# Altium PCB loxonext.PcbDoc
Units mm, origin at the board's own origin, x right, y up, seen from the top; angles counter-clockwise.
Board outline 86.5 x 30.5 mm, 2 copper layers (Sig/Pwr-1, Sig/Gnd-2); 41 components, 28 nets, 168 pads, 37 vias.
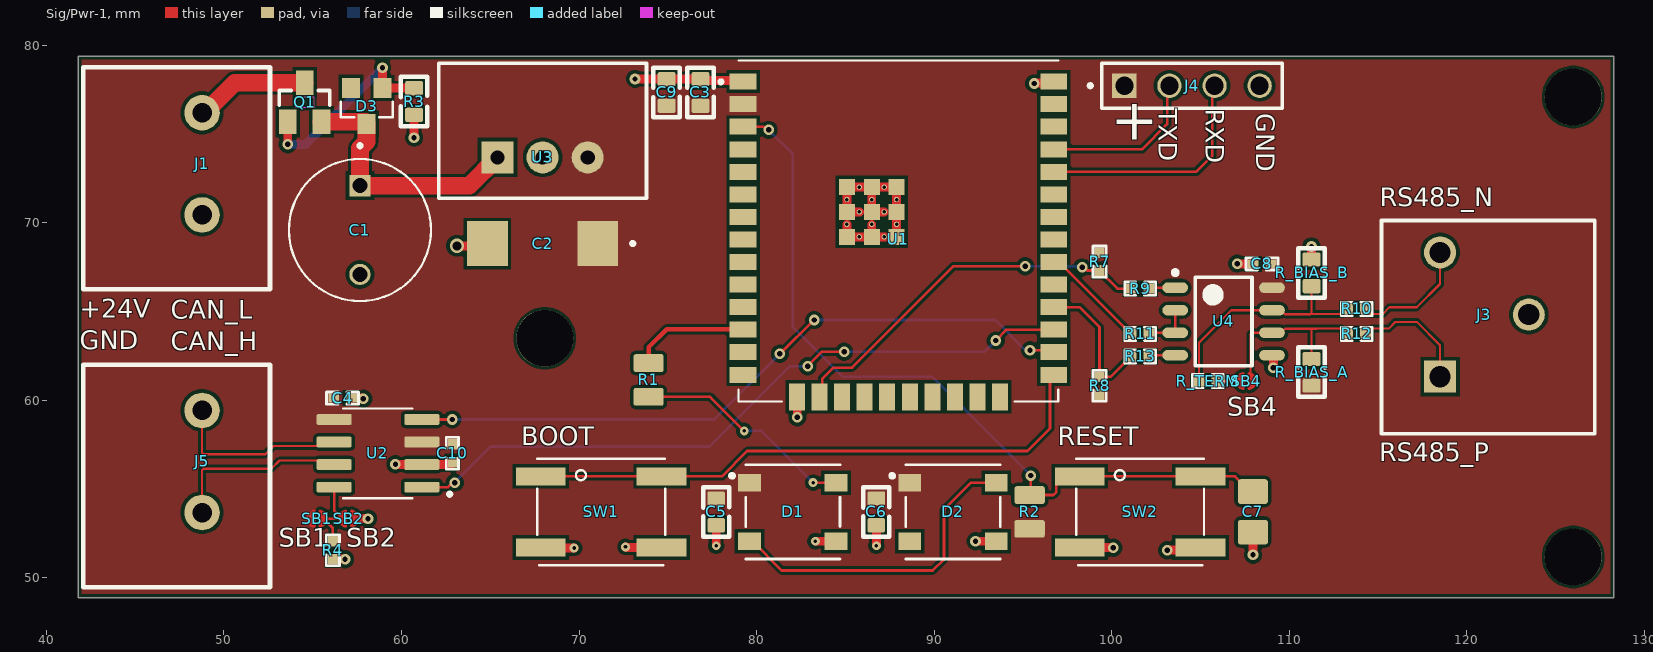
[diagram p0: Sig/Pwr-1 view]
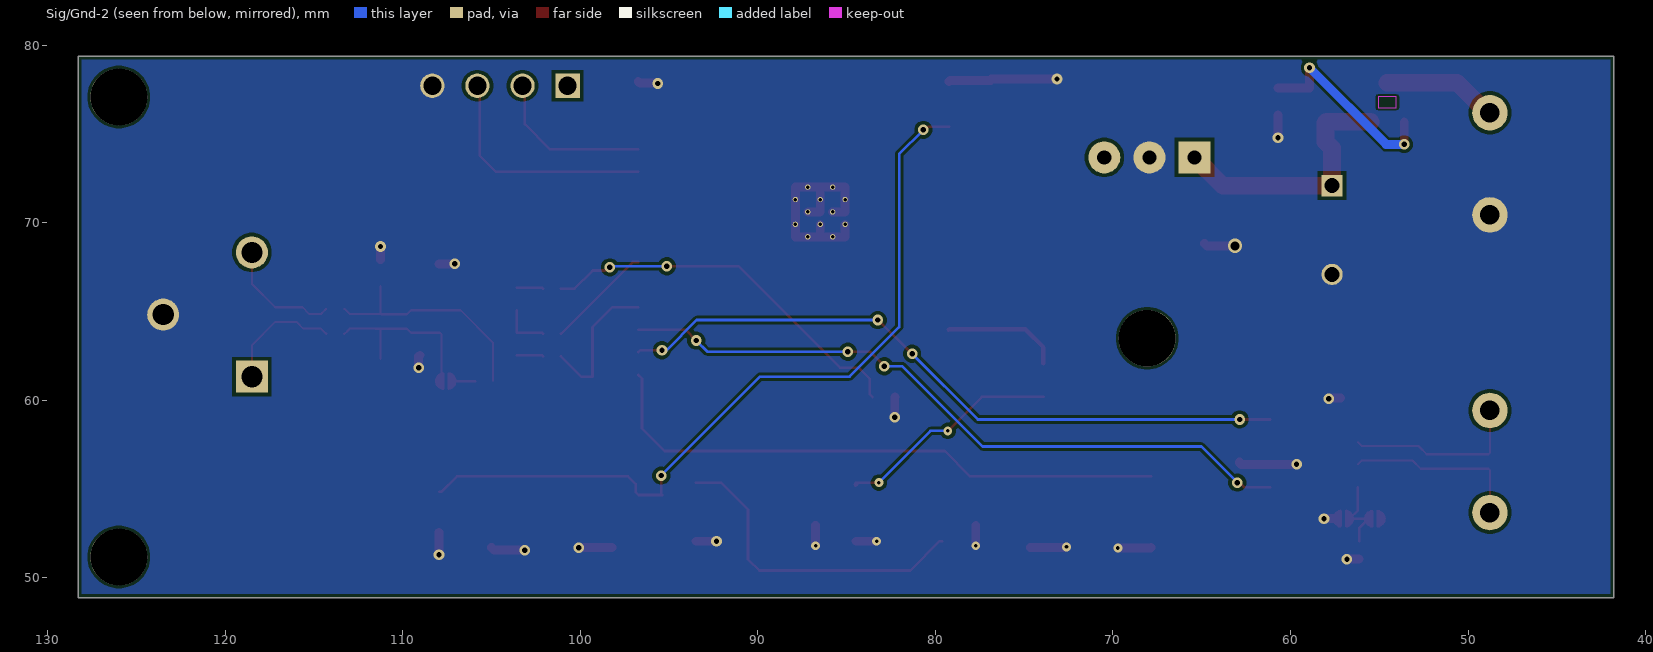
[diagram p1: Sig/Gnd-2 view, seen from below]

## Layer stack, top to bottom
Top Solder: solder mask 0.0102, Solder Resist, Dk 3.5
Sig/Pwr-1: signal copper 0.0356
Dielectric 1: dielectric 0.32, FR-4, Dk 4.8
Sig/Gnd-2: signal copper 0.0356
Bottom Solder: solder mask 0.0102, Solder Resist, Dk 3.5

## Board outline
41.783,48.895 41.783,79.395 128.283,79.395 128.283,48.895

## Design rules (kind name [scope] priority, off if disabled: settings)
BoardOutlineClearance [All] p1: gap=0.254 ignorepadtopadclearanceinfootprint=FALSE except(0: Arc-SplitContinuation Track-SplitContinuation SMDPad-SplitContinuation THPad-SplitContinuation Via-SplitContinuation Fill-SplitContinuation Poly-SplitContinuation Region-SplitContinuation Text-SplitContinuation; 0.2: Arc-OutlineEdge Track-OutlineEdge SMDPad-OutlineEdge THPad-OutlineEdge Via-OutlineEdge Fill-OutlineEdge Poly-OutlineEdge Region-OutlineEdge Text-OutlineEdge)
Clearance [All] p1: gap=0.15 ignorepadtopadclearanceinfootprint=TRUE except(0.18: SMDPad-THPad SMDPad-Via SMDPad-Fill SMDPad-Poly SMDPad-Region SMDPad-Text; 0.2: Arc-THPad Track-THPad THPad-THPad THPad-Via THPad-Fill THPad-Poly THPad-Region THPad-Text Via-Fill Via-Poly Via-Region Text-Text)
DiffPairsRouting [All] p1: maxlimit=0.7 minlimit=0.7 mostfreqgap=0.7 toplayer_minwidth=0.12 toplayer_maxwidth=0.12 toplayer_prefwidth=0.12 bottomlayer_minwidth=0.12 bottomlayer_maxwidth=0.12 bottomlayer_prefwidth=0.12 impedanceprofiledriven=TRUE impedanceprofileid={38C9F42A-9F48-491C-A51E-86A988703F38} impedanceprofilevalue=120.000000 maxuncoupledlength=12.7
PlaneConnect [All] p1: planeconnectstyle=Direct reliefexpansion=0.508 reliefentries=4 reliefconductorwidth=0.254 reliefairgap=0.254
PolygonConnect [All] p1: connectstyle=Direct reliefconductorwidth=0.254 reliefentries=4 polygonreliefangle="90 Angle" airgapwidth=0.254
RoutingVias [All] p1: holewidth=0.2 width=0.5 viastyle="Through Hole" minholewidth=0.2 minwidth=0.5 maxholewidth=0.5 maxwidth=0.8
SolderMaskExpansion [All] p1: expansion=0.102 istentingtop=FALSE
SupplyNets "Schematic Supply Nets_3" [InNet('GND')] p1: voltage=0.000
SupplyNets "Schematic Supply Nets_2" [InNet('+24V_IN')] p2: voltage=0.000
SupplyNets "Schematic Supply Nets_1" [InNet('+3V3')] p3: voltage=0.000
SupplyNets "Schematic Supply Nets" [InNet('+24V_OUT')] p4: voltage=0.000
Width [All] p1: maxlimit=1 minlimit=0.15 preferedwidth=0.25 minimp=50.000000 maximp=50.000000 favimp=50.000000
28 further rules are at their usual default settings.

## Classes and differential pairs
net class CANBUS: CAN_N CAN_P
net class CAN_UART: CAN_RXD CAN_TXD
component class rs485: C8 J3 R7 R8 R9 R10 R11 R12 R13 R_BIAS_A R_BIAS_B R_TERM SB4 U4
component class esp32-wroom-32: C3 C5 C6 C7 C9 D1 D2 J4 R1 R2 SW1 SW2 U1
component class canbus: C1 C2 C4 C10 D3 J1 J5 Q1 R3 R4 SB1 SB2 U2 U3
differential pair RS485: +RS485_P -RS485_N
differential pair CAN: +CAN_P -CAN_N
differential pair _RS485: +_RS485_P -_RS485_N

## Components (designator, comment, footprint, x,y, rotation, side; value= is the part's Value field where it differs from the comment)
C1 "100u 50V" CAPPRD500W60D800H1150 57.658,69.596 r270 top
C2 "220u 10V" CAPPM7343X310N 67.945,68.834 r180 top
C3 "100n 50V" CAP_0603 76.835,77.343 r270 top
C4 "100n 50V" CAPC1005X04L 56.68,60.13 r180 top value=4.7µF
C5 "100n 50V" CAP_0603 77.724,53.721 r90 top
C6 "100n 50V" CAP_0603 86.741,53.721 r90 top
C7 "100n 50V" CAP_0805 107.95,53.721 r90 top
C8 "100n 50V" CAPC1005X04L 108.458,67.691 r0 top value=4.7µF
C9 "10u 50V" CAP_0603 74.93,77.343 r270 top
C10 "100n 50V" CAPC1005X04L 62.865,57.023 r270 top value=4.7µF
D1 "WS2812B" WS2812B_WDS 82.042,53.721 r0 top
D2 "WS2812B" WS2812B_WDS 91.059,53.721 r0 top
D3 "BZX84C10" SOT-23 58.039,76.581 r180 top
J1 "WAGO 243-721" 243-721 48.668,70.5 r180 top
J3 "DG250-3.5-03P-11-00A(H)" DG250-3.5-03P-11-00AH 118.491,61.335 r90 top
J4 "HX PH254-01-04-Z-L11.5" SAMTEC_TSW-104-08-T-S-LL 100.711,77.724 r0 top
J5 "WAGO 243-721" 243-721 48.668,53.736 r180 top
Q1 "AO3401A" SOT23 54.544,76.792 r0 top
R1 "330R" RES_0805 73.914,61.153 r270 top
R2 "10k" RES_0805 95.377,53.721 r90 top
R3 "100k" RES_0603 60.706,76.835 r90 top
R4 "20k" RESC1005X04L 56.134,51.562 r270 top value=0R
R7 "1k5" RESC1005X04L 99.314,67.818 r270 top value=0R
R8 "1k5" RESC1005X04L 99.314,60.833 r90 top value=0R
R9 "220R" RESC1005X04L 101.6,66.294 r180 top value=0R
R10 "33R" RESC1005X04L 113.792,65.151 r180 top value=0R
R11 "220R" RESC1005X04L 101.6,63.754 r180 top value=0R
R12 "33R" RESC1005X04L 113.792,63.754 r180 top value=0R
R13 "220R" RESC1005X04L 101.6,62.484 r180 top value=0R
R_BIAS_A "10k" RES_0603 111.252,61.583 r270 top
R_BIAS_B "10k" RES_0603 111.252,67.183 r270 top
R_TERM "120R" RESC1005X04L 105.41,61.087 r180 top value=0R
SB1 "Solderbridge" Solderbridge 55.245,53.34 r0 top
SB2 "Solderbridge" Solderbridge 57.023,53.34 r0 top
SB4 "Solderbridge" Solderbridge 107.569,61.087 r0 top
SW1 "EVQQ2W03W" EVQQ2W03W 71.247,53.721 r270 top
SW2 "EVQQ2W03W" EVQQ2W03W 101.6,53.721 r270 top
U1 "ESP32-WROOM-32UE" MODULE_ESP32-WROOM-32UE(M113EH6400UH3Q0) 87.984,69.545 r0 top
U2 "SN65HVD230DG4" SOIC127P599X175-8N 58.674,57.023 r180 top
U3 "TSR_1-2433" TSR-1 67.945,75.184 r0 top
U4 "MAX3485EESA+T" SOIC127P600X175-8N 106.299,64.446 r0 top

## Footprints (in the part's own frame and the unit in brackets; to place one, negate y for a bottom-side part, rotate by r counter-clockwise, add the part's x,y. Pads: shape width x height; smd on the part's side, far side on the other; paste and mask are expansions set on the pad)
243-721 [mm] "Connection terminal, 4 pole, 0.5-1.0 mm², clamping points: 4, gray"
  round 2 hole 1.1: 1(-0.1,0.05) 2(-0.1,-5.7)
  silkscreen extent -3.93,-8.27 6.6,4.25, body extent -3.92,-8.23 6.63,4.28, height 10.1
CAP_0603 [mm]
  rrect25% 0.8x1 smd: 1(-0.75,0) 2(0.75,0)
  silkscreen extent -1.4,-0.74 1.39,0.74, body extent -0.8,-0.4 0.8,0.4, height 0.51
CAP_0805 [mm]
  rrect25% 1.4x1.7 smd: 1(-1.143,0) 2(1.143,0)
  body extent -1.15,-0.76 1.15,0.79, height 1.01
CAPC1005X04L [mm]
  rect 0.6x0.5 smd: 1(-0.5,0) 2(0.5,0)
  silkscreen extent -0.9,-0.35 0.9,0.35, body extent -0.51,-0.25 0.51,0.25, height 0.5
CAPPM7343X310N [mm]
  rect 2.3x2.52 smd paste+0 mask+0.102: 1(-3.11,0) 2(3.11,0)
  silkscreen extent -5.18,-0.1 -4.98,0.1, body extent -3.65,-2.15 3.65,2.15, height 3.1
CAPPRD500W60D800H1150 [mm]
  round 1.2 hole 0.85: N(2.5,0)
  rect 1.2x1.2 hole 0.85: P(-2.5,0)
  silkscreen extent -4.85,-4 4,4, body extent -4,-4 4,4, height 11.5
DG250-3.5-03P-11-00AH [mm]
  rect 1.8x1.8 / inner round 1.8 / far side rect 1.8x1.8 hole 1.2: 1(0,0)
  round 1.8 hole 1.2: 2(3.5,-5) 3(7,0)
  silkscreen extent -3.2,-8.7 8.8,3.3, body extent -3.27,-9.62 8.73,2.38, height 13.46
EVQQ2W03W [mm]
  rect 1x2.8 smd: 1(-2,-3.4) 2(-2,3.4) 3(2,-3.4) 4(2,3.4)
  silkscreen extent -3,-3.62 3,3.6, body extent -2.97,-3.35 3.03,3.25, height 3.1
MODULE_ESP32-WROOM-32UE(M113EH6400UH3Q0) [mm]
  rect 1.5x0.9 smd: 1(-8.75,8.41) 2(-8.75,7.14) 3(-8.75,5.87) 4(-8.75,4.6) 5(-8.75,3.33) 6(-8.75,2.06) 7(-8.75,0.79) 8(-8.75,-0.48) 9(-8.75,-1.75) 10(-8.75,-3.02) 11(-8.75,-4.29) 12(-8.75,-5.56) 13(-8.75,-6.83) 14(-8.75,-8.1) 25(8.75,-8.1) 26(8.75,-6.83) 27(8.75,-5.56) 28(8.75,-4.29) 29(8.75,-3.02) 30(8.75,-1.75) 31(8.75,-0.48) 32(8.75,0.79) 33(8.75,2.06) 34(8.75,3.33) 35(8.75,4.6) 36(8.75,5.87) 37(8.75,7.14) 38(8.75,8.41)
  rect 0.9x1.5 smd: 15(-5.71,-9.35) 16(-4.44,-9.35) 17(-3.17,-9.35) 18(-1.9,-9.35) 19(-0.63,-9.35) 20(0.64,-9.35) 21(1.91,-9.35) 22(3.18,-9.35) 23(4.45,-9.35) 24(5.72,-9.35)
  rect 0.9x0.9 smd: 39_1(-2.9,2.47) 39_2(-1.5,2.47) 39_3(-0.1,2.47) 39_4(-2.9,1.07) 39_5(-1.5,1.07) 39_6(-0.1,1.07) 39_7(-2.9,-0.33) 39_8(-1.5,-0.33) 39_9(-0.1,-0.33)
  round 0.3 hole 0.2: 39_10(-2.2,2.47) 39_11(-0.8,2.47) 39_12(-2.9,1.77) 39_13(-1.5,1.77) 39_14(-0.1,1.77) 39_15(-2.2,1.07) 39_16(-0.8,1.07) 39_17(-2.9,0.37) 39_18(-1.5,0.37) 39_19(-0.1,0.37) 39_20(-2.2,-0.33) 39_21(-0.8,-0.33)
  silkscreen extent -10.1,-9.6 9,9.6, body extent -9,-9.6 9,9.6, height 3.35
RES_0603 [mm]
  rrect25% 0.8x1 smd: 1(-0.75,0) 2(0.75,0)
  silkscreen extent -1.4,-0.75 1.39,0.74, body extent -0.8,-0.43 0.8,0.43, height 0.52
RES_0805 [mm]
  rrect25% 1x1.7 smd: 1(-0.95,0) 2(0.95,0)
  body extent -1,-0.63 1,0.63, height 0.47
RESC1005X04L [mm]
  rect 0.6x0.55 smd mask+0.05: 1(-0.5,0) 2(0.5,0)
  silkscreen extent -0.87,-0.38 0.88,0.38, body extent -0.5,-0.25 0.5,0.25, height 0.3
SAMTEC_TSW-104-08-T-S-LL [mm]
  rect 1.37x1.37 hole 1.02: 01(0,0)
  round 1.37 hole 1.02: 02(2.54,0) 03(5.08,0) 04(7.62,0)
  silkscreen extent -2.02,-1.27 8.89,1.27
SOIC127P599X175-8N [mm]
  rrect25% 1.97x0.6 smd: 1(-2.47,1.905) 2(-2.47,0.635) 3(-2.47,-0.635) 4(-2.47,-1.905) 5(2.47,-1.905) 6(2.47,-0.635) 7(2.47,0.635) 8(2.47,1.905)
  silkscreen extent -4.14,-2.52 1.95,2.52, body extent -3,-2.45 3,2.45, height 1.75
SOIC127P600X175-8N [mm] "SOIC, 8-Leads, Body 4.91x3.90mm, Pitch 1.27mm, IPC Medium Density"
  oval 1.45x0.6 smd: 1(-2.725,1.905) 2(-2.725,0.635) 3(-2.725,-0.635) 4(-2.725,-1.905) 5(2.725,-1.905) 6(2.725,-0.635) 7(2.725,0.635) 8(2.725,1.905)
  silkscreen extent -2.85,-2.5 1.6,2.88, body extent -3,-2.5 3,2.5, height 1.75
Solderbridge [mil]
  round 1 smd paste+0: 1(-13.78,0) 2(13.78,0)
  Sig/Pwr-1 region: -7.49,19.36 -15.76,15.74 -21.55,8.8 -23.62,0 -23.62,0 -21.55,-8.79 -15.76,-15.74 -7.49,-19.36 -7.49,-19.36 -6.18,-19.31 -5.02,-18.71 -4.22,-17.68 -3.94,-16.4 -3.94,-16.4 -3.94,16.4 -4.22,17.68 -5.02,18.71 -6.18,19.31 -7.49,19.36
  Sig/Pwr-1 region: 7.49,-19.36 15.76,-15.74 21.55,-8.8 23.62,0 23.62,0 21.55,8.79 15.76,15.74 7.49,19.36 7.49,19.36 6.18,19.31 5.02,18.71 4.22,17.68 3.94,16.4 3.94,16.4 3.94,-16.4 4.22,-17.68 5.02,-18.71 6.18,-19.31 7.49,-19.36
SOT23 [mm]
  rect 1x1.4 smd: 1(-0.95,-1.1) 2(0.95,-1.1) 3(0,1.1)
  Keep-Out Layer region: 0.5,-0.3 -0.5,-0.3 -0.5,0.3 0.5,0.3
  silkscreen extent -1.42,-0.15 1.42,0.66, body extent -1.45,-1.7 1.45,1.1, height 1.25
SOT-23 [mil]
  rect 40x45 smd: 1(-35,-40) 2(35,-40) 3(0,40)
  silkscreen extent -58,-10 58,25, body extent -57,-51 57,51, height 55
TSR-1 [mm]
  rect 1.8x1.8 hole 0.8: 1(-2.54,-1.5)
  round 1.8 hole 0.8: 2(0,-1.5) 3(2.54,-1.5)
  silkscreen extent -5.85,-3.8 5.85,3.8, body extent -5.8,-3.78 5.9,3.72, height 10.2
WS2812B_WDS [mm]
  rect 1.29x0.99 smd paste+0 mask+0: 1(-2.436,1.65) 2(-2.436,-1.65) 3(2.436,-1.65) 4(2.436,1.65)
  silkscreen extent -3.52,-2.65 2.65,2.65, body extent -2.73,-2.53 2.73,2.53, height 1.63

## Part data
C1: library part ECA1HHG101B, "100F 50V Aluminum Electrolytic Capacitors Radial, Can 1000 Hrs @ 105C", Package="RADIAL-2 Panasonic", Availability="In Stock", Check_prices=https://www.snapeda.com/parts/ECA-1HHG101B/Panasonic%20Electronic%20Components/view-part/800817/?ref=eda, MF="Panasonic Electronic", MP=ECA-1HHG101B, Price=None, SnapEDA_Link=https://www.snapeda.com/parts/ECA-1HHG101B/Panasonic%20Electronic%20Components/view-part/800817/?ref=snap
C2: library part TPSD227M010R0050, "220 ÂµF Molded Tantalum Capacitors 10 V 2917 (7343 Metric) 50mOhm", Package="2917 AVX", Check_prices=https://www.snapeda.com/parts/TPSD227M010R0050/AVX/view-part/?ref=eda, MF=AVX, MP=TPSD227M010R0050, SnapEDA_Link=https://www.snapeda.com/parts/TPSD227M010R0050/AVX/view-part/?ref=snap
C3 C5 C6 C9: library part CAP_0603, "Capacitor SMD 0603"
C4 C8 C10: library part C0402-4µ7, "Capacitor, X5R, ±20%", Manufacturer=N.A., Part number IPS="00000001251, 00000007165", Part number NEMS=100200193, Supplier Part Number 1=490-13252-1-ND, Artikkelnr Noca=20039482, Author=rsk, Component Class=Capacitors, Component Status=Active, ComponentLink1Description=Datasheet, ComponentLink1URL=N.A., ComponentLink2Description="Supplier link", ComponentLink2URL=N.A., Footprint Doc=0402, HelpURL=N.A., LatestRevisionDate=2017-11-09, Manufacturer Part Number=N.A., Note=10V, Pad Count=2, Part Number=C0402-4µ7, Part number Norautron=N.A., PartId=100200193, Published=2009-05-08, Supplier 1=Digi-Key, Supplier 2=N.A., Supplier Part Number 2=N.A.
C7: library part CAP_0805, "Capacitor SMD 0805"
D1 D2: "Description", Manufacturer_Name=Worldsemi, Copyright="Copyright (C) 2026 Ultra Librarian. All rights reserved.", Manufacturer_Part_Number=WS2812B, RefDes=RefDes, Type=Type
J1 J5: library part 243-721, "TERM BLOCK PLUG 1POS 5.75MM"
J3: "Terminal block; 3.5mm; with push button; angled 45Â°; ways: 3; 5A", Package=None, Check_prices=https://www.snapeda.com/parts/DG250-3.5-03P-11-00A(H)/Degson/view-part/?ref=eda, MF=Degson, MP=DG250-3.5-03P-11-00A(H), SnapEDA_Link=https://www.snapeda.com/parts/DG250-3.5-03P-11-00A(H)/Degson/view-part/?ref=snap
J4: library part 4PIN_TSW-104-08-T-S-LL, Package=None, Availability=Unavailable, MF=Samtec, MP=TSW-104-08-T-S-LL, Price=None
Q1: "P-Channel 30 V 4A (Ta) 1.4W (Ta) Surface Mount SOT-23-3", Package="SOT-23 Alpha &amp; Omega Semiconductor", Check_prices=https://www.snapeda.com/parts/AO3401A/Alpha/view-part/?ref=eda, MF="Alpha & Omega Semiconductor", MP=AO3401A, SnapEDA_Link=https://www.snapeda.com/parts/AO3401A/Alpha/view-part/?ref=snap
R1 R2: library part RES_0805, "Resistor SMD 0805"
R3 R_BIAS_A R_BIAS_B: library part RES_0603, "Resistor SMD 0603"
R4 R7 R8 R9 R10 R11 R12 R13 R_TERM: library part R0402-0R, "Resistor, ±5%, 0.063W", Manufacturer=N.A., Part number IPS=00000007128, Part number NEMS=100100109, Supplier Part Number 1=146-9661, Artikkelnr Noca=27049000, Author=rsk, Component Class=Resistors, Component Status=Active, ComponentLink1Description=Datasheet, ComponentLink1URL=N.A., ComponentLink2Description="Supplier link", ComponentLink2URL=N.A., Footprint Doc=0402, HelpURL=N.A., LatestRevisionDate=2009-11-23, Manufacturer Part Number=N.A., Note="Chip Res 5%", Pad Count=2, Part Number=R0402-0R, Part number Norautron=N.A., PartId=100100109, Published=2009-05-08, Supplier 1=Farnell, Supplier 2=N.A., Supplier Part Number 2=N.A.
SB1 SB2 SB4: Manufacturer=N.A., Part number NEMS=100500458, Artikkelnr Noca=N.A., Author=rsk, Component Class=Connectors, Component Status=Active, ComponentLink1Description=Datasheet, ComponentLink1URL=N.A., ComponentLink2Description="Supplier link", ComponentLink2URL=N.A., Footprint Doc=Solderbridge, HelpURL=N.A., LatestRevisionDate=2009-12-14, Manufacturer Part Number=N.A., Note=N.A., Pad Count=2, Part Number=Solderbridge, Part number IPS=N.A., Part number Norautron=N.A., PartId=100500458, Published=2009-12-14, Supplier 1=N.A., Supplier 2=N.A., Supplier Part Number 1=N.A., Supplier Part Number 2=N.A., System=Connector
SW1 SW2: "White Push Plate Tactile Switch, SPST-NO 20 mA 3.1mm", Package=None, Availability="In Stock", Check_prices=https://www.snapeda.com/parts/EVQQ2W03W/Panasonic/view-part/?ref=eda, MF=Panasonic, MP=EVQQ2W03W, Price=None, SnapEDA_Link=https://www.snapeda.com/parts/EVQQ2W03W/Panasonic/view-part/?ref=snap
U1: library part ESP32-WROOM-32UE(M113EH6400UH3Q0), "Bluetooth, WiFi 802.11b/g/n, Bluetooth v4.2 +EDR, Class 1, 2 and 3 Transceiver Module 2.4GHz ~ 2.5GHz Antenna Not Included, U.FL Surface Mount", Package=None, Availability="Not in stock", Check_prices=https://www.snapeda.com/parts/ESP32-WROOM-32UE(M113EH6400UH3Q0)/Espressif+Systems/view-part/?ref=eda, MF="Espressif Systems", MP=ESP32-WROOM-32UE(M113EH6400UH3Q0), Price=None, SnapEDA_Link=https://www.snapeda.com/parts/ESP32-WROOM-32UE(M113EH6400UH3Q0)/Espressif+Systems/view-part/?ref=snap
U2: "3.3 V CAN Transceiver with Standby Mode 8-SOIC -40 to 85", Package="SOIC-8 Texas Instruments", Check_prices=https://www.snapeda.com/parts/SN65HVD230DG4/Texas+Instruments/view-part/?ref=eda, MF="Texas Instruments", MP=SN65HVD230DG4, SnapEDA_Link=https://www.snapeda.com/parts/SN65HVD230DG4/Texas+Instruments/view-part/?ref=snap
U3: "1 Amp POL switching regulator, 4.6 to -36 VDC input, pos.-pos. circuit, LM78 compatible, SIP-3", Package="SIP-3 Traco Power", Availability="In Stock", Check_prices=https://www.snapeda.com/parts/TSR%201-2433/Traco%20Power/view-part/6027450/?ref=eda, MF="Traco Power", MP="TSR 1-2433", Price=None, Purchase-URL="https://pricing.snapeda.com/search/part/TSR 1-2433/?ref=eda", SnapEDA_Link=https://www.snapeda.com/parts/TSR%201-2433/Traco%20Power/view-part/6027450/?ref=snap
U4: "3.3V Powered, Â±15kV ESD-Protected, 12Mbps, Slew-Rate-Limited True RS-485/RS-422 Transceivers3.3V ä¾›ç”µã€Â±15kV ESD ä¿æŠ¤ã€12Mbpsã€åŽ‹æ‘†çŽ‡å—é™çš„çœŸæ­£ RS-485/RS-422 æ”¶å‘å™¨", Package="SOIC-8 Maxim", Check_prices=https://www.snapeda.com/parts/MAX3485EESA+T/Analog+Devices/view-part/?ref=eda, MF="Analog Devices", MP=MAX3485EESA+T, SnapEDA_Link=https://www.snapeda.com/parts/MAX3485EESA+T/Analog+Devices/view-part/?ref=snap
D3: ki_description="Zener Dual Diode Common Anode", ki_keywords="Zener Dual Diode Common Anode"

## Free pads (board coordinates)
  round 3.2 hole 3.2 unplated: 1(68.072,63.5) 2(125.984,77.089) 3(125.984,51.181)

## Via types
v1: diameter 0.6, hole 0.3, Sig/Pwr-1 to Sig/Gnd-2, tented both sides, 29 vias
v2: diameter 0.5, hole 0.2, Sig/Pwr-1 to Sig/Gnd-2, tented both sides, 7 vias
v3: diameter 0.8, hole 0.5, Sig/Pwr-1 to Sig/Gnd-2, tented both sides, 1 vias

## Nets (pads, with @x,y where several pads share a name; then routed paths per layer and width w, separated by ;. In a path a pad name is that pad's centre, name@x,y a point inside that pad or via, vN(x,y) a via of type N, cw(c..) or ccw(c..) an arc to the next point about the centre after c; other vN are vias at no path point)
+3V3: C2.1 C3.2 C4.2 C5.2 C6.2 C8.2 C9.2 C10.1 D1.1 D2.1 J4.01 R2.1 R7.1 R8.1 R_BIAS_A.2 SB1.1 U1.2 U2.3 U2.5 U3.3 U4.8
+24V_IN: J1.2 Q1.3 | length 6.5
  Sig/Pwr-1 w1: J1.2 48.92,76.2 50.612,77.892 Q1.3
+24V_OUT: C1.P D3.3 Q1.2 U3.1 | length 14.7
  Sig/Pwr-1 w1: Q1.2 57.975,75.692 58.039,75.629 D3.3 58.031,75.557 58.031,74.569 57.658,74.196 C1.P 63.817,72.096 U3.1
_RS485_N: R10.2 R_BIAS_B.2 R_TERM.2 U4.7 | length 13.1
  Sig/Pwr-1 w0.12: R_TERM.2 104.91,63.254 106.737,65.081 U4.7 109.534,65.081 109.759,64.856 111.191,64.856 111.197,64.862 ; R_BIAS_B.2 111.252,64.918 111.197,64.862 ; R10.2 113.267,65.151 113.052,64.936 113.052,64.933 112.982,64.862 111.197,64.862
_RS485_P: R12.2 R_BIAS_A.1 SB4.2 U4.6 | length 10.1
  Sig/Pwr-1 w0.12: SB4.2 107.823,61.183 107.823,63.741 107.893,63.811 109.534,63.811 109.759,64.036 111.53,64.036 111.536,64.042 112.982,64.042 113.052,63.972 113.052,63.969 113.267,63.754 R12.2 ; R_BIAS_A.1 111.252,64.008
_RS485_R/W: R11.1 U4.2 U4.3 | length 2.8
  Sig/Pwr-1 w0.15: R11.1 102.157,63.811 U4.3 U4.2
_RS485_RX: R9.1 U4.1 | length 1.5
  Sig/Pwr-1 w0.15: R9.1 102.157,66.351 U4.1
_RS485_TX: R13.1 U4.4 | length 1.5
  Sig/Pwr-1 w0.15: R13.1 102.157,62.541 U4.4
BOOT: SW1.1 SW1.2 U1.25 | length 32.9
  Sig/Pwr-1 w0.15: SW1.1 SW1.2 78.039,55.721 79.467,57.15 95.25,57.15 96.52,58.42 96.52,61.231 U1.25
CAN_N: J5.2 U2.6 | length 10.1
  Sig/Pwr-1 w0.12: J5.2 48.768,57.041 48.838,56.971 52.325,56.971 52.787,57.433 55.979,57.433 U2.6
CAN_P: J5.1 U2.7 | length 10.1
  Sig/Pwr-1 w0.12: J5.1 48.768,56.081 48.838,56.151 52.665,56.151 53.127,56.613 55.979,56.613 U2.7
CAN_RXD: U1.26 U2.4 | length 38.7
  Sig/Pwr-1 w0.15: U2.4 v1(62.865,58.928) ; v1(81.31,62.629) 81.329,62.629 83.227,64.527 v1(83.246,64.527) ; v1(95.398,62.823) 96.626,62.823 U1.26
  Sig/Gnd-2 w0.15: v1(62.865,58.928) 77.609,58.928 v1(81.31,62.629) ; v1(83.246,64.527) 93.441,64.527 95.145,62.823 v1(95.398,62.823)
CAN_TXD: U1.27 U2.1 | length 39.3
  Sig/Pwr-1 w0.15: U2.1 62.616,55.118 62.87,55.372 v1(62.992,55.372) ; v1(82.871,61.932) 83.687,62.748 v1(84.926,62.748) ; v1(93.472,63.373) 94.084,63.985 U1.27
  Sig/Gnd-2 w0.15: v1(62.992,55.372) 65.024,57.404 77.343,57.404 81.871,61.932 v1(82.871,61.932) ; v1(84.926,62.748) 92.847,62.748 v1(93.472,63.373)
GND: C1.N C2.2 C3.1 C4.1 C5.1 C6.1 C7.1 C8.1 C9.1 C10.2 D1.3 D2.3 J1.1 J3.2 J4.04 R3.1 R4.2 R_BIAS_B.1 SB2.2 SW1.3 SW1.4 SW2.3 SW2.4 U1.1 U1.15 U1.38 U1.39_1 U1.39_2 U1.39_3 U1.39_4 U1.39_5 U1.39_6 U1.39_7 U1.39_8 U1.39_9 U1.39_10 U1.39_11 U1.39_12 U1.39_13 U1.39_14 U1.39_15 U1.39_16 U1.39_17 U1.39_18 U1.39_19 U1.39_20 U1.39_21 U2.2 U3.2 U4.5 | length 47
  Sig/Pwr-1 w0.5: R4.2 56.814,51.062 v1(56.822,51.054) ; C4.1 57.786,60.13 57.824,60.092 v1(57.851,60.092) ; SB2.2 v1(58.116,53.341) ; v1(59.657,56.41) 59.668,56.399 61.133,56.399 U2.2 62.78,56.388 62.865,56.473 C10.2 ; v1(60.706,74.803) R3.1 ; v3(63.119,68.707) 64.708,68.707 C2.2 ; SW1.3 67.879,51.689 v2(69.723,51.689) ; v2(72.615,51.75) 72.645,51.721 SW1.4 ; v1(73.152,78.105) 73.158,78.099 74.924,78.099 C9.1 C3.1 76.904,78.024 79.165,78.024 U1.1 ; v2(77.724,51.816) C5.1 ; U1.15 82.285,60.184 82.285,59.066 v1(82.296,59.055) ; v2(83.312,52.07) v2(83.312,52.07) D1.3 ; U1.39_17 U1.39_7 U1.39_20 U1.39_8 ; U1.39_15 U1.39_4 U1.39_12 U1.39_1 U1.39_10 U1.39_2 ; U1.39_18 U1.39_8 ; v2(86.741,51.816) C6.1 ; U1.39_16 U1.39_5 U1.39_13 U1.39_2 ; v1(92.329,52.07) D2.3 ; v1(95.631,77.851) 95.65,77.87 96.649,77.87 U1.38 ; SW2.3 100.078,51.721 v1(100.091,51.708) ; v1(103.124,51.562) 103.143,51.581 104.86,51.581 SW2.4 ; v1(107.063,67.707) 107.079,67.691 C8.1 ; C7.1 107.958,52.57 v1(107.958,51.309) ; U4.5 109.1,62.465 v1(109.1,61.846) ; v1(111.248,68.671) 111.252,68.667 R_BIAS_B.1 ; U1.39_8 U1.39_21 U1.39_9 U1.39_19 U1.39_6 U1.39_14 U1.39_3 U1.39_11 U1.39_2
NetD3_1: D3.1 Q1.1 R3.2 | length 11.3
  Sig/Pwr-1 w0.5: v1(53.594,74.422) Q1.1 ; v1(58.928,78.74) D3.1 58.934,77.591 60.7,77.591 R3.2
  Sig/Gnd-2 w0.5: v1(53.594,74.422) 54.61,74.422 v1@58.909,78.721
NetR_TERM_1: R_TERM.1 SB4.1 | length 1.3
  Sig/Pwr-1 w0.15: R_TERM.1 SB4.1
nRESET: C7.2 R2.2 SW2.1 SW2.2 U1.3 | length 44.8
  Sig/Pwr-1 w0.15: U1.3 80.373,75.415 80.552,75.237 v1(80.673,75.237) ; v1(95.443,55.768) 95.443,54.737 R2.2 96.708,54.671 96.875,54.838 96.875,55.296 97.3,55.721 SW2.1 SW2.2 106.943,55.721 107.8,54.864 C7.2
  Sig/Gnd-2 w0.15: v1(80.673,75.237) 82.042,73.868 82.042,64.135 84.836,61.341 89.87,61.341 v1(95.443,55.768)
RS: R4.1 SB1.2 SB2.1 U2.8 | length 4.6
  Sig/Pwr-1 w0.15: R4.1 56.134,52.801 SB1.2 SB2.1 56.204,53.809 U2.8
RS485_N: J3.3 R10.1 | length 6.8
  Sig/Pwr-1 w0.12: R10.1 114.317,65.151 114.532,64.936 114.532,64.933 114.602,64.862 115.255,64.862 115.637,65.245 117.18,65.245 118.491,66.556 J3.3
RS485_P: J3.1 R12.1 | length 6.8
  Sig/Pwr-1 w0.12: R12.1 114.317,63.754 114.532,63.969 114.532,63.972 114.602,64.042 115.595,64.042 115.977,64.425 117.18,64.425 118.491,63.114 J3.1
RS485_R/W: R11.2 U1.30 | length 6
  Sig/Pwr-1 w0.15: U1.30 97.034,67.795 101.075,63.754 R11.2
RS485_RX: R7.2 R9.2 U1.16 | length 21.7
  Sig/Pwr-1 w0.15: U1.16 83.693,60.344 83.693,61.214 84.328,61.849 85.383,61.849 91.098,67.564 v1(95.123,67.564) ; v1(98.331,67.493) 98.453,67.493 98.628,67.318 R7.2 99.314,67.293 100.313,66.294 R9.2
  Sig/Gnd-2 w0.15: v1(95.123,67.564) 98.26,67.564 v1(98.331,67.493)
RS485_TX: R8.2 R13.2 U1.28 | length 8.1
  Sig/Pwr-1 w0.15: U1.28 98.194,65.255 99.314,64.135 R8.2 99.924,61.333 101.075,62.484 R13.2
RXDO: J4.03 U1.34 | length 13.3
  Sig/Pwr-1 w0.15: U1.34 104.752,72.875 105.664,73.787 105.664,77.597 J4.03
TXDO: J4.02 U1.35 | length 9.2
  Sig/Pwr-1 w0.15: U1.35 101.704,74.145 103.124,75.565 103.124,77.597 J4.02
WS_ARR0: R1.1 U1.12 | length 6.6
  Sig/Pwr-1 w0.25: R1.1 73.914,62.992 74.93,64.008 79.211,64.008 U1.12
WS_ARR1: D1.4 R1.2 | length 12.6
  Sig/Pwr-1 w0.15: R1.2 77.382,60.203 v2(79.3,58.285) ; v2(83.185,55.372) D1.4 D1.4
  Sig/Pwr-1 w0.25: D1.4@84.455,55.267 D1.4@84.478,55.244
  Sig/Gnd-2 w0.15: v2(79.3,58.285) 80.272,58.285 v2(83.185,55.372)
WS_ARR2: D1.2 D2.4 | length 18.3
  Sig/Pwr-1 w0.15: D1.2 79.756,52.071 81.408,50.419 89.916,50.419 90.551,51.054 90.551,53.848 92.075,55.372 D2.4 D2.4
pads on no net: D2.2 D3.2 U1.4 U1.5 U1.6 U1.7 U1.8 U1.9 U1.10 U1.11 U1.13 U1.14 U1.17 U1.18 U1.19 U1.20 U1.21 U1.22 U1.23 U1.24 U1.29 U1.31 U1.32 U1.33 U1.36 U1.37

## Polygon pours and split planes (outlines as drawn)
+3V3 on Sig/Pwr-1 "+3V3" (solid, pour order 0): 41.783,48.895 128.284,48.895 128.284,79.396 41.783,79.396
GND on Sig/Gnd-2 "+3V3" (solid, pour order 1): 41.783,48.895 128.284,48.895 128.284,79.395 41.783,79.395

## Silkscreen, mask and mechanical layers (free items; w line width, h text height)
Top Overlay:
  text "TXD" at 102.274,76.426 h1.8 r270
  text "RXD" at 104.941,76.426 h1.8 r270
  text "GND" at 107.794,76.166 h1.78 r270
  text "+" at 99.949,73.914 h4
  text "RS485_N" at 115.083,70.568 h1.8
  text "+24V" at 41.883,64.277 h1.8
  text "CAN_L" at 47.002,64.24 h1.8
  text "GND" at 41.883,62.527 h1.8
  text "CAN_H" at 46.99,62.462 h1.8
  text "SB4" at 106.518,58.81 h1.78
  text "BOOT" at 66.747,57.118 h1.8
  text "RESET" at 96.963,57.118 h1.8
  text "RS485_P" at 115.062,56.217 h1.8
  text "SB1" at 53.086,51.435 h1.78
  text "SB2" at 56.896,51.435 h1.78
Mechanical 1:
  the board outline again, w0.254